# Altium PCB PCB1Extention2.PcbDoc
Units mm, origin at the board's own origin, x right, y up, seen from the top; angles counter-clockwise.
Board outline 73.99 x 43.99 mm, 2 copper layers (Top Layer, Bottom Layer); 19 components, 29 nets, 90 pads, 3 vias.
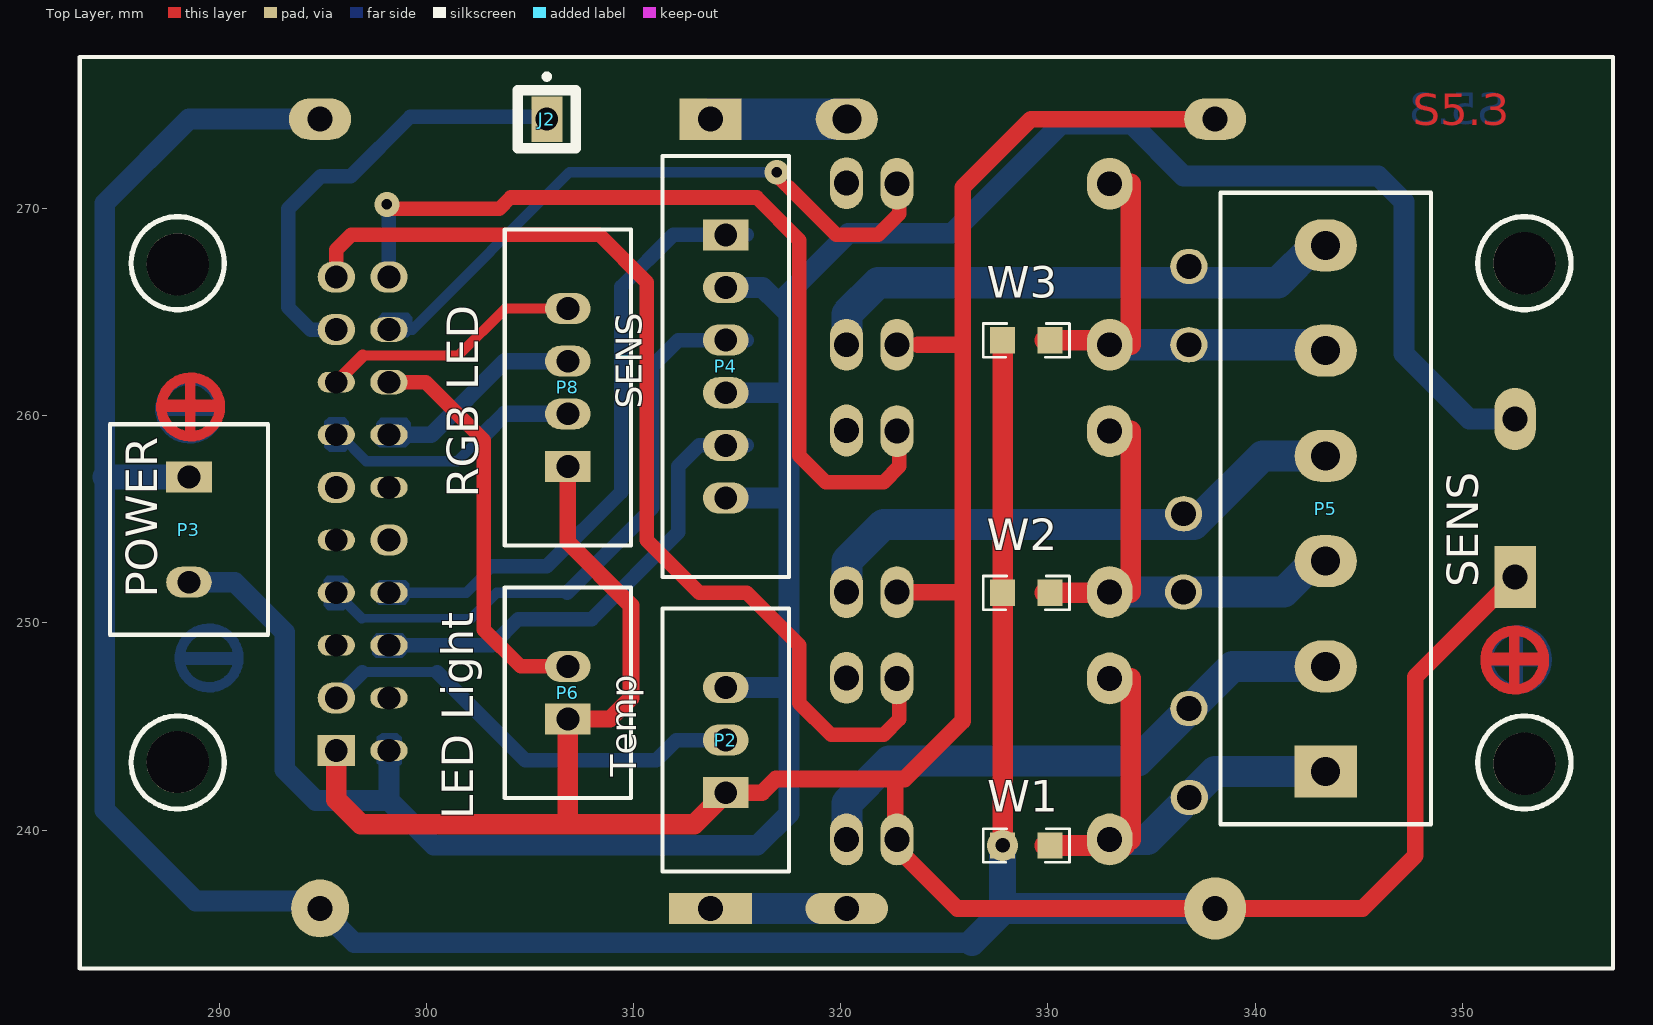
[diagram p0: Top Layer view]
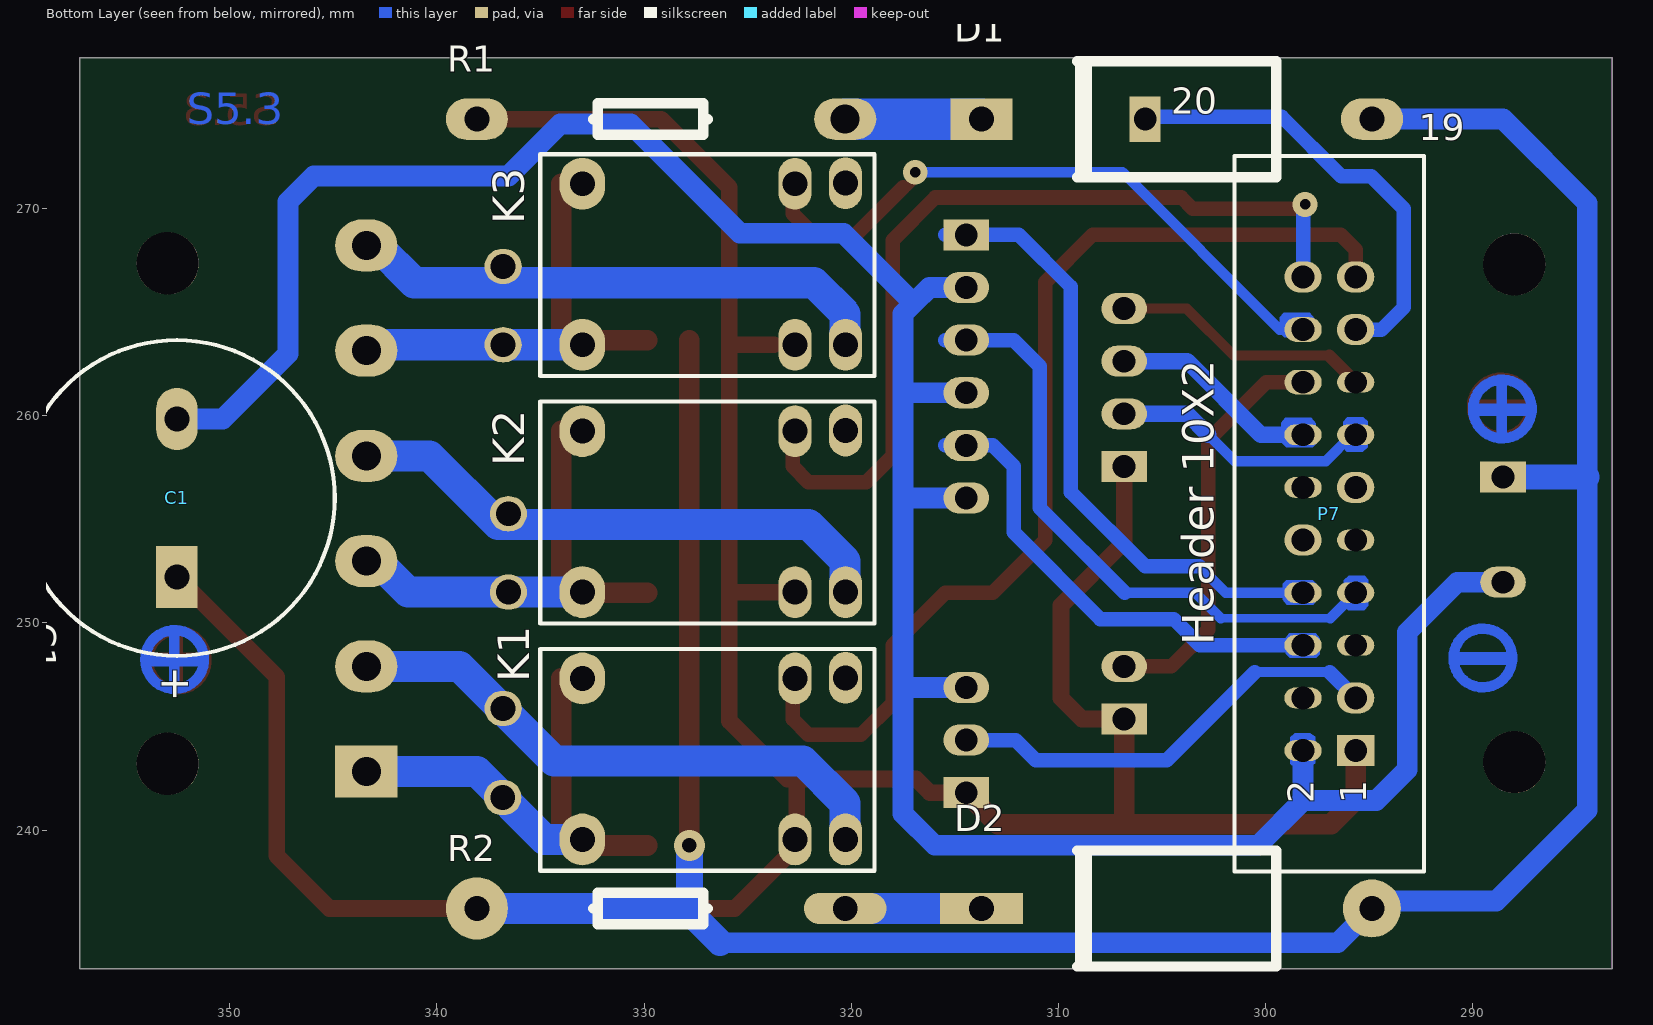
[diagram p1: Bottom Layer view, seen from below]

## Layer stack, top to bottom
Top Layer: signal copper 0.0356
Dielectric: dielectric 0.32, FR-4, Dk 4.8
Bottom Layer: signal copper 0.0356

## Board outline
283.261,233.299 357.251,233.299 357.251,277.292 283.261,277.292 283.261,233.299

## Design rules (kind name [scope] priority, off if disabled: settings)
Clearance [All] p1: gap=0.4
PolygonConnect [All] p1: connectstyle=Relief reliefconductorwidth=0.254 reliefentries=4 polygonreliefangle="90 Angle"
RoutingVias [All] p1: holewidth=0.711 width=2.54 viastyle="Through Hole" minholewidth=0.4 minwidth=1.27 maxholewidth=5 maxwidth=10
SilkscreenOverComponentPads [All] p1: minsilkscreentomaskgap=0.254
SolderMaskExpansion [All] p1: expansion=0.102
TestPointUsage [All] p1: valid=0 allowmultiple=FALSE
Testpoint [All] p1: side=15 testpointundercomponent=TRUE minsize=1.016 maxsize=2.54 preferedsize=1.524 minholesize=0 maxholesize=1.016 preferedholesize=0.813 testpointgrid=0.025 style=1023 order=0123456789
Width [All] p1: maxlimit=2.54 minlimit=0.254 preferedwidth=0.254
23 further rules are at their usual default settings.

## Components (designator, comment, footprint, x,y, rotation, side; value= is the part's Value field where it differs from the comment)
C1 "Cap Pol1" RB7.6-15 352.552,256.032 r270 bottom
D1 "Diode 1N5408" DO-201AD#1 304.292,274.32 r0 bottom
D2 "Diode 1N5408" DO-201AD#2 304.292,236.22 r0 bottom
J2 "Socket" PIN1 305.816,274.32 r0 top
K1 "Relay" relay-6pin 326.644,243.332 r0 bottom
K2 "Relay" relay-6pin 326.644,255.27 r0 bottom
K3 "Relay" relay-6pin 326.644,267.208 r0 bottom
P2 "Temp" HDR1X3 314.452,241.808 r90 top
P3 "POWER" HDR1X2#1 288.544,257.048 r270 top
P4 "SENS" HDR1X6#1 314.452,268.732 r270 top
P5 "SENS" HDR1X6#2 343.408,242.824 r90 top
P6 "LED Light" HDR1X2#2 306.832,245.364 r90 top
P7 "Header 10X2" HDR2X10 295.656,243.84 r90 bottom
P8 "RGB LED" HDR1X4 306.832,257.556 r90 top
R1 "Res1" AXIAL-0.3#1 329.692,274.32 r180 bottom
R2 "Res1" AXIAL-0.3#2 329.692,236.22 r180 bottom
W1 "Jumper" jumper 328.95,239.268 r0 top
W2 "Jumper" jumper 328.95,251.46 r0 top
W3 "Jumper" jumper 328.95,263.652 r0 top

## Footprints (in the part's own frame and the unit in brackets; to place one, negate y for a bottom-side part, rotate by r counter-clockwise, add the part's x,y. Pads: shape width x height; smd on the part's side, far side on the other; paste and mask are expansions set on the pad)
AXIAL-0.3#1 [mm] "Resistor; 2 Leads"
  oval 3x2 hole 1.2: 1(-8.382,0)
  oval 3x2 hole 1.4: 2(9.398,0)
  silkscreen extent -2.77,-0.76 2.77,0.76
AXIAL-0.3#2 [mm] "Resistor; 2 Leads"
  round 3 hole 1.2: 1(-8.382,0)
  oval 4x1.5 hole 1.2: 2(9.398,0)
  silkscreen extent -2.77,-0.76 2.77,0.76
DO-201AD#1 [mm] "Diode, Axial; Body 9.5 x 5.6 mm (LxDia. max), Lead Dia. 1.32 mm (max)"
  oval 3x2 hole 1.2: 1(-9.42,0)
  rect 3x2 hole 1.2: 2(9.42,0)
  silkscreen extent -4.8,-2.8 4.9,2.8
DO-201AD#2 [mm] "Diode, Axial; Body 9.5 x 5.6 mm (LxDia. max), Lead Dia. 1.32 mm (max)"
  round 2.8 hole 1.2: 1(-9.42,0)
  rect 4x1.5 hole 1.2: 2(9.42,0)
  silkscreen extent -4.8,-2.8 4.9,2.8
HDR1X2#1 [mm] "Connector; Header; 2 Position"
  rect 1.5x2.2 hole 1.1: 1(0,0)
  oval 1.5x2.2 hole 1.1: 2(5.08,0)
  silkscreen extent -2.54,-3.81 7.62,3.81
HDR1X2#2 [mm] "Connector; Header; 2 Position"
  rect 1.5x2.2 hole 1.1: 1(0,0)
  oval 1.5x2.2 hole 1.1: 2(2.54,0)
  silkscreen extent -3.81,-3.05 6.35,3.05
HDR1X3 [mm] "Connector; Header; 3 Position"
  rect 1.5x2.2 hole 1.1: 1(0,0)
  oval 1.5x2.2 hole 1.1: 2(2.54,0) 3(5.08,0)
  silkscreen extent -3.81,-3.05 8.89,3.05
HDR1X4 [mm] "Connector; Header; 4 Position"
  rect 1.5x2.2 hole 1.1: 1(0,0)
  oval 1.5x2.2 hole 1.1: 2(2.54,0) 3(5.08,0) 4(7.62,0)
  silkscreen extent -3.81,-3.05 11.43,3.05
HDR1X6#1 [mm] "Connector; Header; 6 Position"
  rect 1.5x2.2 hole 1.1: 1(0,0)
  oval 1.5x2.2 hole 1.1: 2(2.54,0) 3(5.08,0) 4(7.62,0) 5(10.16,0) 6(12.7,0)
  silkscreen extent -3.81,-3.05 16.51,3.05
HDR1X6#2 [mm] "Connector; Header; 6 Position"
  rect 2.5x3 hole 1.4: 1(0,0)
  oval 2.5x3 hole 1.4: 2(5.08,0) 3(10.16,0) 4(15.24,0) 5(20.32,0) 6(25.4,0)
  silkscreen extent -2.54,-5.08 27.94,5.08
HDR2X10 [mm] "Connector; Header; 10x2 Position"
  rect 1.5x1.8 hole 1.1: 1(0,0)
  oval 1x1.8 hole 1.1: 2(0,2.54) 4(2.54,2.54) 5(5.08,0) 6(5.08,2.54) 7(7.62,0) 8(7.62,2.54) 9(10.16,0) 12(12.7,2.54) 13(15.24,0) 14(15.24,2.54) 15(17.78,0)
  oval 1.5x1.8 hole 1.1: 3(2.54,0) 10(10.16,2.54) 11(12.7,0) 17(20.32,0) 19(22.86,0) 20(22.86,2.54)
  oval 1.2x1.8 hole 1.1: 16(17.78,2.54) 18(20.32,2.54)
  silkscreen extent -5.84,-3.3 28.7,5.84
jumper [mm]
  rect 1.2x1.27 smd: 1(-1.133,-0.008) 2(1.153,-0.008)
  silkscreen extent -2.07,-0.82 2.09,0.8, body extent -1.49,-0.67 1.51,0.65, height 0.65
PIN1 [mm] "Connector; Plug"
  rect 1.5x2.2 hole 1.1: 1(0,0)
  silkscreen extent -1.4,-1.4 1.4,2.17
RB7.6-15 [mm] "Polarized Capacitor (Radial); 2 Leads"
  rect 3x2 hole 1.2: 1(3.81,0)
  oval 3x2 hole 1.2: 2(-3.81,0)
  silkscreen extent -7.62,-7.62 7.62,7.62
relay-6pin [mm]
  oval 2.2x2.5 hole 1.2: 1(6.338,-3.99) 1(6.338,3.781)
  oval 1.6x2.5 hole 1.2: 2(-6.364,-4.019) 3(-6.364,3.781) 4(-3.928,3.781) 5(-3.928,-3.99)
  silkscreen extent -7.76,-5.42 8.37,5.29, body extent -7.79,-5.4 8.4,5.27, height 9.5

## Part data
C1: "Polarized Capacitor (Radial)"
D1 D2: "3 Amp Medium Power Silicon Rectifier Diode"
K1 K2 K3: "SPDT Relay"
P2: library part "Header 3", "Header, 3-Pin"
P3 P6: library part "Header 2", "Header, 2-Pin"
P4 P5: library part "Header 6", "Header, 6-Pin"
P7: "Header, 10-Pin, Dual row"
P8: library part "Header 4", "Header, 4-Pin"
R1 R2: "Resistor"
W1 W2 W3: "Jumper Wire"

## Free pads (board coordinates)
  round 3 hole 3: 0(288,243.281) 0(288,267.31) 0(353,243.205) 0(353,267.36)
  round 0 all layers, no hole: 0(320.281,237.283) 0(320.281,273.283)
  oval 1.8x1.7 hole 1.2: 1(336.804,263.427) 1(336.804,267.208) 2(336.55,255.27) 3(336.55,251.489) 4(336.804,245.872) 5(336.826,241.576)

## Via types
v1: diameter 1.2, hole 0.5, Top Layer to Bottom Layer, 2 vias
v2: diameter 1.5, hole 0.7, Top Layer to Bottom Layer, 1 vias

## Nets (pads, with @x,y where several pads share a name; then routed paths per layer and width w, separated by ;. In a path a pad name is that pad's centre, name@x,y a point inside that pad or via, vN(x,y) a via of type N, cw(c..) or ccw(c..) an arc to the next point about the centre after c; other vN are vias at no path point)
+12: C1.1 K1.4 K2.4 K3.4 P2.1 P6.1 P7.1 P8.1 R1.1 R2.1 | length 146.5
  Top Layer w0.8: P6.1 308.864,245.364 309.88,246.38 309.88,250.85 306.832,253.898 P8.1 ; P2.1 316.205,241.808 316.865,242.468 322.631,242.468 ; K1.4@322.631,239.217 325.628,236.22 R2.1 345.186,236.22 347.726,238.76 347.726,247.396 C1.1 ; K1.4@322.631,239.551 322.631,242.468 ; K2.4 325.853,251.489 ; 323.732,263.427 325.853,263.427 ; R1.1 329.184,274.32 325.882,271.018 325.882,245.262 323.088,242.468 322.631,242.468
  Top Layer w1: P7.1 295.656,241.478 296.85,240.284 306.832,240.284 ; P6.1 306.832,240.284 ; P2.1 312.928,240.284 306.832,240.284
+12IN: D1.1 D2.1 P3.1 W1.1 W2.1 W3.1 | length 119.6
  Top Layer w1: v2(327.817,239.26) W2.1 W3.1
  Bottom Layer w1: D1.1 288.544,274.32 284.48,270.256 284.48,240.97 288.874,236.576 294.516,236.576 296.522,234.57 326.34,234.57
  Bottom Layer w1.2: 284.48,257.048 P3.1
  Bottom Layer w1.3: 326.34,234.57 327.817,236.047 v2(327.817,239.26)
GND: C1.2 P2.3 P3.2 P4.2 P4.4 P4.6 P7.2 | length 127.3
  Bottom Layer w1: P3.2 290.754,251.968 293.167,249.555 293.167,242.926 294.665,241.427 298.196,241.427 ; P7.2 298.196,241.427 ; P2.3 317.5,246.888 ; P4.6 317.5,256.032 ; P4.4 317.5,261.112 ; P4.2 316.23,266.192 316.992,265.43 ; C1.2 350.342,259.842 347.193,262.992 347.193,270.332 345.948,271.577 336.55,271.577 334.046,274.081 330.646,274.081 325.374,268.808 320.37,268.808 316.992,265.43 ; 298.196,241.427 300.355,239.268 315.976,239.268 317.5,240.792 317.5,246.888 ; 316.992,265.43 317.5,264.922 317.5,261.112 ; 317.5,246.888 317.5,256.032 ; 317.5,256.032 317.5,261.112
HUMIDSENS01: P4.1 P7.8 | length 30.2
  Bottom Layer w0.5: P7.8 301.93,251.46 303.2,252.73
  Bottom Layer w0.7: 303.2,252.73 305.816,252.73 309.397,256.311 309.397,266.217 311.912,268.732 P4.1 P4.1@315.468,268.732
HUMIDSENS02: P4.3 P7.7 | length 29.9
  Bottom Layer w0.4: 296.89,250.226 302.169,250.226
  Bottom Layer w0.5: P7.7 296.89,250.226 ; 302.169,250.226 303.403,251.46 306.807,251.46
  Bottom Layer w0.7: 306.807,251.46 310.896,255.549 310.896,262.382 312.166,263.652 P4.3 P4.3@315.468,263.652
HUMIDSENS03: P4.5 P7.6 | length 23.1
  Bottom Layer w0.7: P7.6 303.174,248.92 304.444,250.19 307.975,250.19 312.166,254.381 312.166,257.556 313.182,258.572 P4.5 P4.5@315.468,258.572
HUMIDSENS04: P7.5
KEYBUTTON01: P7.9
KEYBUTTON02: P7.10
KEYBUTTON03: P7.11
LEDINDICATOR01: P7.12
LEDLIGHT01: P7.13 P8.2 | length 14.1
  Bottom Layer w0.5: P7.13@295.834,259.08 297.104,257.81 301.498,257.81 303.784,260.096
  Bottom Layer w0.8: P7.13 P7.13@295.834,259.08 ; 302.768,259.08 303.784,260.096 P8.2
LEDLIGHT02: P7.14 P8.3 | length 10.1
  Bottom Layer w0.8: P7.14 300.228,259.08 303.784,262.636 P8.3
LEDLIGHT03: P7.15 P8.4 | length 12.6
  Top Layer w0.4: 296.926,262.89 296.946,262.91 297.162,262.91
  Top Layer w0.5: 297.162,262.91 301.543,262.91 303.809,265.176 P8.4
  Top Layer w0.6: P7.15 296.926,262.89
LEDLIGHT04: P6.2 P7.16 | length 19.7
  Top Layer w0.7: P7.16 299.974,261.62 302.768,258.826 302.768,249.682 304.546,247.904 P6.2
LIGHTSENS01: P7.4
NetD1_2: D1.2 R1.2 | length 6.6
  Bottom Layer w2: D1.2 R1.2
NetD2_2: D2.2 R2.2 | length 6.6
  Bottom Layer w1.5: D2.2 R2.2
NetK1_1: K1.1 P5.1 pad.5 W1.2 | length 21.9
  Top Layer w1: W1.2@329.849,239.26 W1.2 K1.1@333.706,239.26 ; K1.1@333.998,239.551 K1.1@333.998,247.322
  Bottom Layer w1.5: K1.1@333.998,239.551 334.801,239.551 338.074,242.824 P5.1@342.9,242.824
NetK1_3: K1.3 P5.2 pad.4 | length 27.1
  Bottom Layer w1.5: K1.3@320.294,239.551 320.294,241.3 322.326,243.332 334.339,243.332 338.911,247.904 P5.2@342.9,247.904
NetK2_1: K2.1 P5.3 pad.3 W2.2 | length 21.4
  Top Layer w1: W2.2@329.849,251.452 W2.2 K2.1@333.96,251.452 ; K2.1@333.998,251.489 K2.1@333.998,259.26
  Bottom Layer w1.5: K2.1@333.998,251.489 341.405,251.489 P5.3@342.9,252.984
NetK2_3: K2.3 P5.4 pad.2 | length 26.2
  Bottom Layer w1.5: K2.3@320.294,251.489 320.294,252.984 322.072,254.762 337.058,254.762 340.36,258.064 P5.4@342.9,258.064
NetK3_1: K3.1 P5.5 pad.1@336.804,263.427 W3.2 | length 21.1
  Top Layer w1: W3.2@329.849,263.644 W3.2 333.782,263.644 333.998,263.427 K3.1@333.998,271.198
  Bottom Layer w1: P5.5@342.617,263.427 342.9,263.144 P5.5@342.826,263.218
  Bottom Layer w1.5: K3.1@333.998,263.427 P5.5@342.617,263.427
NetK3_3: K3.3 P5.6 pad.1@336.804,267.208 | length 25.5
  Bottom Layer w1.5: K3.3@320.294,263.427 320.294,264.922 321.793,266.421 341.097,266.421 P5.6@342.9,268.224
POMP01: K1.5 P7.19 | length 50.1
  Top Layer w0.7: P7.19 295.656,268.021 296.367,268.732 308.356,268.732 310.642,266.446 310.642,254 313.182,251.46 315.468,251.46 318.008,248.92 318.008,246.126 319.532,244.602 322.072,244.602 322.834,245.364 322.834,247.068 K1.5@323.088,247.322
POMP02: K2.5 P7.20 | length 42
  Top Layer w0.7: v1@298.094,270.002 303.53,270.002 304.063,270.535 315.951,270.535 318.008,268.478 318.008,258.064 319.278,256.794 322.072,256.794 322.834,257.556 K2.5@322.834,259.26
  Bottom Layer w0.7: P7.20 v1@298.196,269.926
  other v1: 298.094,270.205
RELAY01: K3.5 P7.18 | length 31.2
  Top Layer w0.5: v1@316.613,271.764 317.359,271.018 317.468,271.018
  Top Layer w0.7: 317.484,271.034 319.786,268.732 321.818,268.732 322.834,269.748 K3.5@322.834,271.198
  Bottom Layer w0.5: P7.18 299.314,264.16 306.908,271.755 v1(316.916,271.755)
RES3: J2.1 P7.17 | length 21.9
  Bottom Layer w0.7: P7.17 294.411,264.16 293.345,265.227 293.345,270.002 294.898,271.555 296.346,271.555 299.212,274.422 305.714,274.422 J2.1
TEMPSENS01: P2.2 P7.3 | length 21.5
  Bottom Layer w0.5: 296.906,247.63 300.527,247.63
  Bottom Layer w0.7: P7.3 296.906,247.63 ; 300.527,247.63 304.775,243.383 311.099,243.383 312.064,244.348 P2.2
pads on no net: K1.2 K2.2 K3.2
copper on no net: | length 54.3
  Top Layer w0.5: 290.043,260.426 ccw(c288.626,260.426) 290.043,260.426 ; 353.949,248.209 ccw(c352.533,248.209) 353.949,248.209
  Bottom Layer w0.5: 289.992,260.325 ccw(c288.576,260.325) 289.992,260.325 ; 290.932,248.31 ccw(c289.515,248.31) 290.932,248.31 ; 354.076,248.234 ccw(c352.66,248.234) 354.076,248.234
  Bottom Layer w1.5: 328.27,236.22 338.074,236.22

## Polygon pours and split planes (outlines as drawn)
GND on Bottom Layer "Bottom Layer-No Net" (solid, shelved, pour order 1000): 207.297,228.255 270.401,228.255 270.401,171.792 207.297,171.792

## Keep-outs
Keep-Out Layer:
  the board outline again, w0.01

## Other copper
Top Layer:
  rectangle: 287.249,260.172 290.043,260.782
  rectangle: 288.341,259.182 288.849,261.849
  rectangle: 351.155,247.955 353.949,248.564
  rectangle: 352.247,246.964 352.755,249.631
  text "S5.3" at 347.599,274.015 h1.52
Bottom Layer:
  rectangle: 352.425,246.913 352.933,249.58
  rectangle: 351.333,247.904 354.127,248.514
  rectangle: 288.188,247.98 290.982,248.59
  rectangle: 287.249,259.994 290.043,260.604
  rectangle: 288.341,259.004 288.849,261.671
  region net GND: 297.866,243.027 297.612,243.23 297.612,244.5 297.84,244.678 298.602,244.678 298.806,244.475 298.806,243.205 298.628,243.027
  region net HUMIDSENS03: 297.383,249.25 297.586,249.504 298.856,249.504 299.034,249.276 299.034,248.514 298.831,248.31 297.561,248.31 297.383,248.488
  region net HUMIDSENS02: 295.986,252.273 296.24,252.07 296.24,250.8 296.012,250.622 295.25,250.622 295.046,250.825 295.046,252.095 295.224,252.273
  region net HUMIDSENS01: 299.187,251.13 298.983,250.876 297.713,250.876 297.536,251.104 297.536,251.866 297.739,252.07 299.009,252.07 299.187,251.892
  region net LEDLIGHT01: 295.326,258.267 295.072,258.47 295.072,259.74 295.3,259.918 296.062,259.918 296.266,259.715 296.266,258.445 296.088,258.267
  region net LEDLIGHT02: 297.561,259.41 297.764,259.664 299.034,259.664 299.212,259.436 299.212,258.674 299.009,258.47 297.739,258.47 297.561,258.648
  region net LEDLIGHT02: 297.586,259.639 297.79,259.893 299.06,259.893 299.237,259.664 299.237,258.902 299.034,258.699 297.764,258.699 297.586,258.877
  region net RELAY01: 297.663,264.719 297.866,264.973 299.136,264.973 299.314,264.744 299.313,263.982 299.11,263.779 297.84,263.779 297.662,263.957
  text "S5.3" at 352.069,274.066 h1.52

## Silkscreen, mask and mechanical layers (free items; w line width, h text height)
Top Overlay:
  circle w0.254: c288,243.265 r2.25
  circle w0.254: c288,267.365 r2.25
  circle w0.254: c353,267.365 r2.25
  circle w0.254: c353,243.265 r2.25
  lines w0.2: 283.27,233.315 283.27,277.315 357.27,277.315 357.27,233.315 283.27,233.315
Mechanical 2:
  lines w0.01: 309.24,243.383 315.248,243.383 315.248,251.658 309.26,251.658 309.26,243.403 ; 321.248,246.411 327.215,246.411 327.215,263.372 321.283,263.372 321.283,246.446 ; 294.64,241.3 303.64,241.3 303.64,275.191 294.64,275.191 294.64,241.3 ; 309.234,254.252 315.259,254.252 315.259,267.673 309.245,267.673 309.234,267.662 309.234,254.252 ; 337.675,240.761 337.675,270.761 346.675,270.761 346.675,240.761 337.675,240.761

## Text inside footprints (layer, text, board x,y; h text height)
C1: Bottom Overlay "+" at 353.289,247.9 h1.5 r90
P7: Bottom Overlay "20" at 304.546,274.574 h1.27; Bottom Overlay "19" at 292.608,273.304 h1.27; Bottom Overlay "1" at 295.148,241.3 h1.27 r270; Bottom Overlay "2" at 297.688,241.3 h1.27 r270